# Altium PCB main.PcbDoc
Units mm, origin at the board's own origin, x right, y up, seen from the top; angles counter-clockwise.
Board outline 210 x 160 mm, 2 copper layers (Top Layer, Bottom Layer); 19 components, 0 nets, 784 pads, 0 vias.
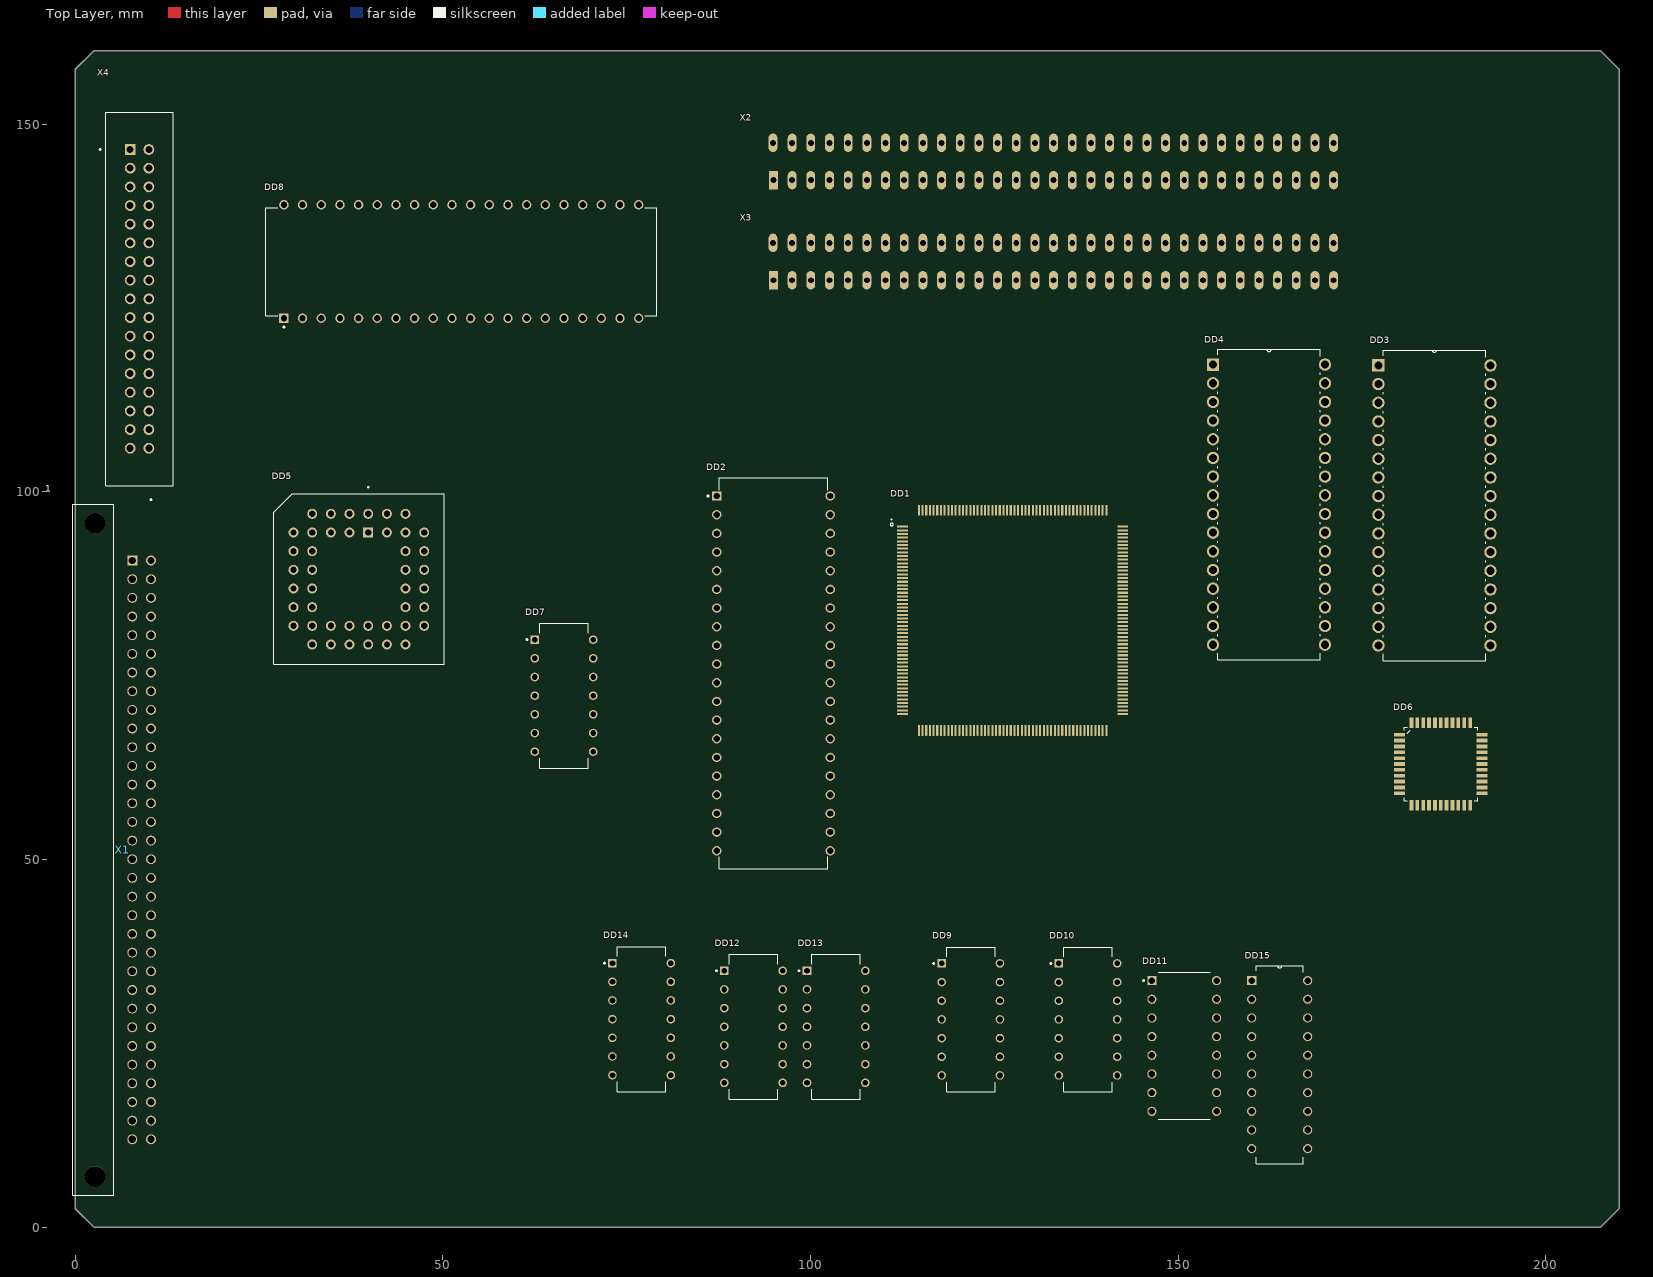
[diagram p0: Top Layer view]
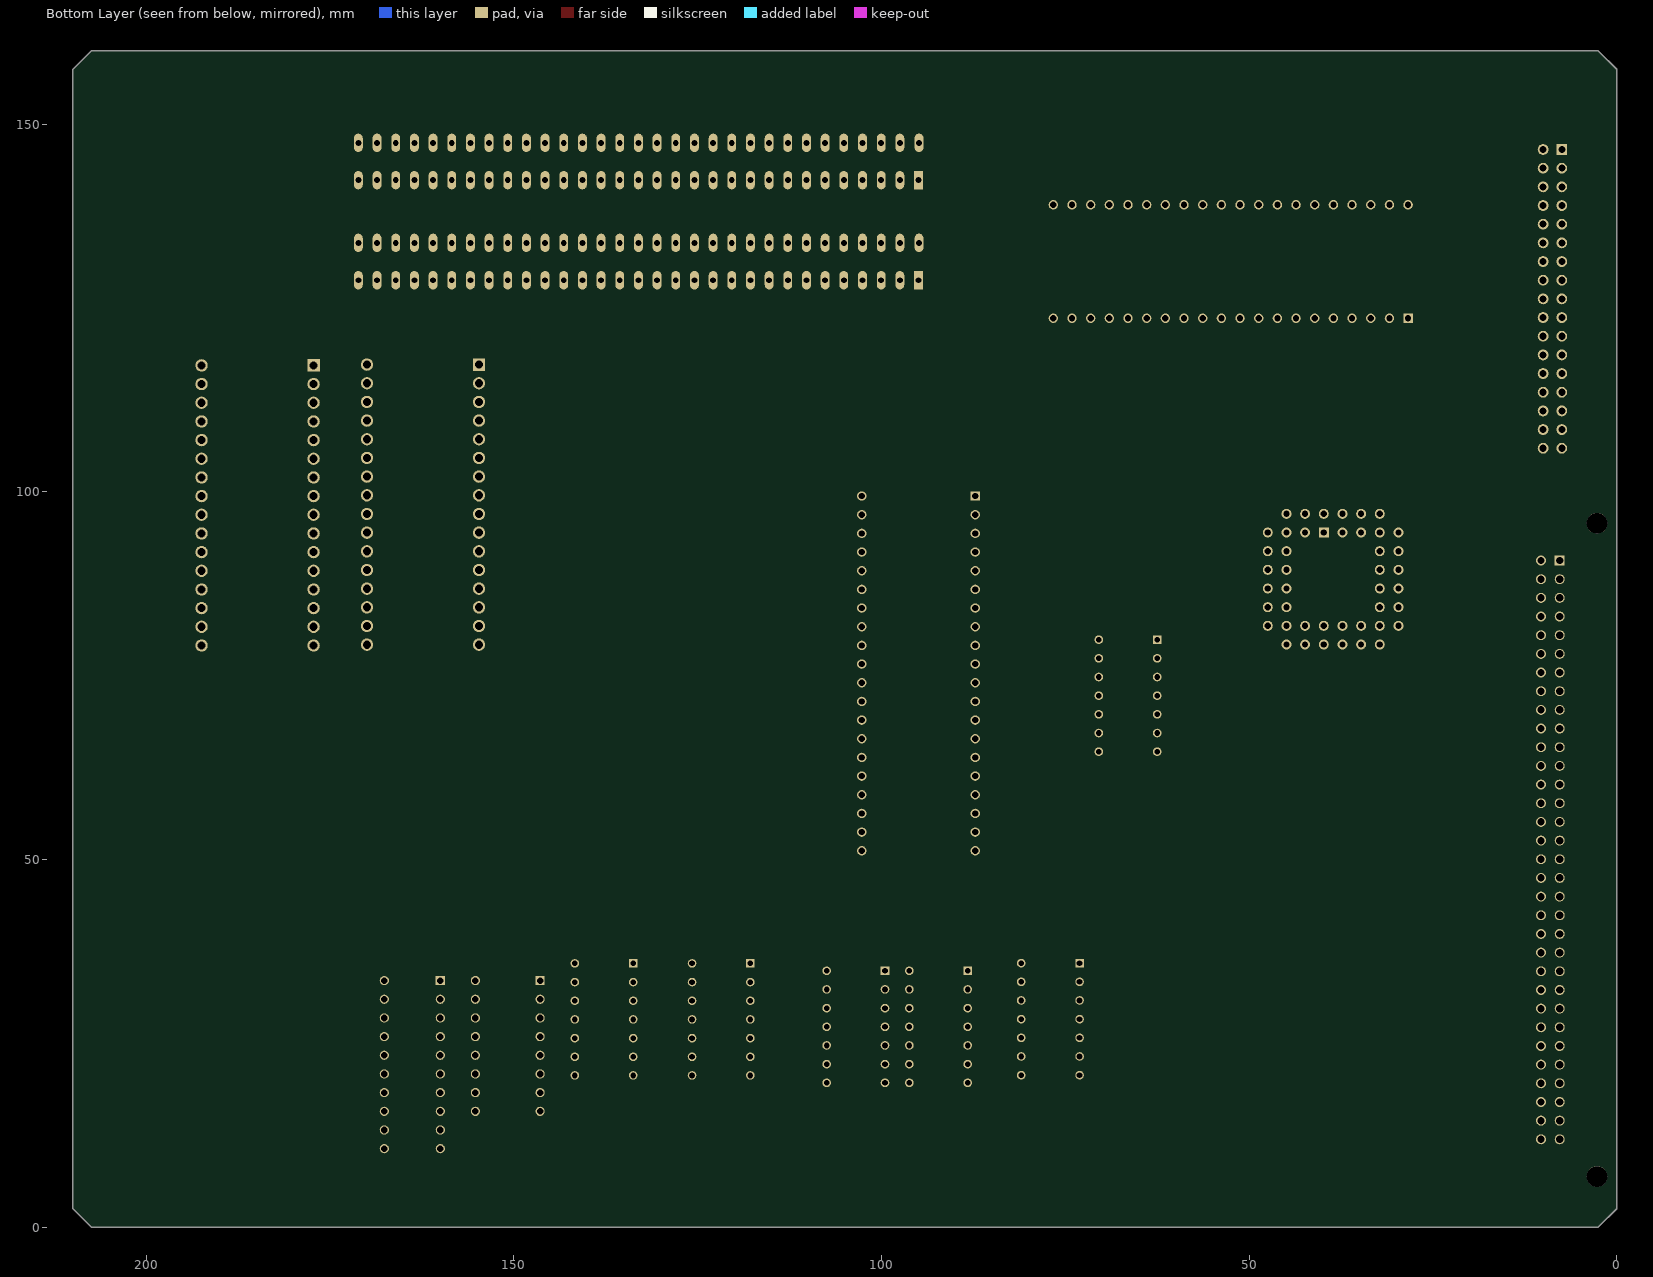
[diagram p1: Bottom Layer view, seen from below]

## Layer stack, top to bottom
Top Solder: solder mask 0.0102, Solder Resist, Dk 3.5
Top Layer: signal copper 0.0356
Dielectric 1: dielectric 0.32, FR-4, Dk 4.8
Bottom Layer: signal copper 0.0356
Bottom Solder: solder mask 0.0102, Solder Resist, Dk 3.5

## Board outline
2.5,0 0,2.5 0,157.5 2.5,160 207.5,160 210,157.5 210,2.5 207.5,0

## Design rules (kind name [scope] priority, off if disabled: settings)
Clearance [All] p1: gap=0.254 ignorepadtopadclearanceinfootprint=FALSE except(0: Arc-Hole Track-Hole SMDPad-Hole THPad-Hole Via-Hole Fill-Hole Poly-Hole Region-Hole Text-Hole)
PolygonConnect [All] p1: connectstyle=Relief reliefconductorwidth=0.254 reliefentries=4 polygonreliefangle="90 Angle" airgapwidth=0.254
RoomDefinition main [InComponentClass('main')] p1: confinementstyle=ConfineIn formatcopy=TRUE lockcomponents=FALSE outline 0,0 210,0 210,160 0,160
RoutingVias [All] p1: holewidth=0.711 width=1.27 viastyle="Through Hole" minholewidth=0.711 minwidth=1.27 maxholewidth=0.711 maxwidth=1.27
SolderMaskExpansion [All] p1: expansion=0.102
Width [All] p1: maxlimit=0.254 minlimit=0.254 preferedwidth=0.254
30 further rules are at their usual default settings.

## Components (designator, comment, footprint, x,y, rotation, side; value= is the part's Value field where it differs from the comment)
DD1 "epm3512aqc208-10" QFP50P3060X3060X409-208N 127.5,82.54 r0 top
DD2 "Z80" DIP1540W47P254L5320H635Q40B 94.97,75.32 r0 top
DD3 "HM628512ALP-7" DIP254P1524X482-32 192.5,79.12 r0 top
DD4 "AM29F040B" DIP254P1524X482-32 170,79.23 r0 top
DD5 "EPM3032ALC44" PLCC-44-R 38.57,88.14 r0 top
DD6 "EPM3032ATC44" QFP80P1200X1200X120-44N 185.75,63 r0 top
DD7 "КР1533ЛН1" DIP14 66.47,72.29 r0 top
DD8 "КР1818ВГ93" KR1818VG93 52.5,131.35 r90 top
DD9 "КР1533ТМ2" DIP14 121.81,28.25 r0 top
DD10 "КР1533ИЕ5" DIP14 137.75,28.25 r0 top
DD11 "КР1533ИЕ7" DIP16 150.85,24.64 r0 top
DD12 "КР1533ЛИ3" DIP14 92.25,27.25 r0 top
DD13 "КР1533ЛП5" DIP14 103.5,27.25 r0 top
DD14 "КР1533ЛA3" DIP14 77.03,28.29 r0 top
DD15 "КР1533ИР23" DIP20 167.64,10.67 r0 top
X1 "System" TE_6-1393644-3 10.29,90.68 r270 top
X2 "Bus" SL62 94.97,142.42 r90 top
X3 "Bus" SL62 94.97,128.81 r90 top
X4 "FDD" TE_103309-7 8.73,126.27 r90 top

## Footprints (in the part's own frame and the unit in brackets; to place one, negate y for a bottom-side part, rotate by r counter-clockwise, add the part's x,y. Pads: shape width x height; smd on the part's side, far side on the other; paste and mask are expansions set on the pad)
DIP14 [mm]
  rect 1.17x1.17 hole 0.77: 1(-3.97,7.62)
  round 1.17 hole 0.77: 2(-3.97,5.08) 3(-3.97,2.54) 4(-3.97,0) 5(-3.97,-2.54) 6(-3.97,-5.08) 7(-3.97,-7.62) 8(3.97,-7.62) 9(3.97,-5.08) 10(3.97,-2.54) 11(3.97,0) 12(3.97,2.54) 13(3.97,5.08) 14(3.97,7.62)
  silkscreen extent -5.15,-9.84 3.3,9.84, body extent -3.96,-9.65 3.96,9.65, height 5.59
DIP16 [mm]
  rect 1.25x1.25 / inner round 1.25 / far side rect 1.25x1.25 hole 0.9: 1(-4.4,8.89)
  round 1.25 hole 0.9: 2(-4.4,6.35) 3(-4.4,3.81) 4(-4.4,1.27) 5(-4.4,-1.27) 6(-4.4,-3.81) 7(-4.4,-6.35) 8(-4.4,-8.89) 9(4.4,-8.89) 10(4.4,-6.35) 11(4.4,-3.81) 12(4.4,-1.27) 13(4.4,1.27) 14(4.4,3.81) 15(4.4,6.35) 16(4.4,8.89)
  silkscreen extent -5.62,-10 3.55,10, body extent -4.62,-10 4.62,10, height 5.1
DIP20 [mm]
  rect 1.25x1.25 / inner round 1.25 / far side rect 1.25x1.25 hole 0.9: 1(-7.62,22.86)
  round 1.25 hole 0.9: 2(-7.62,20.32) 3(-7.62,17.78) 4(-7.62,15.24) 5(-7.62,12.7) 6(-7.62,10.16) 7(-7.62,7.62) 8(-7.62,5.08) 9(-7.62,2.54) 10(-7.62,0) 11(0,0) 12(0,2.54) 13(0,5.08) 14(0,7.62) 15(0,10.16) 16(0,12.7) 17(0,15.24) 18(0,17.78) 19(0,20.32) 20(0,22.86)
  silkscreen extent -7.01,-2.03 -0.61,24.89, body extent -7.75,-1.27 0.13,24.13, height 5.08
DIP254P1524X482-32 [mil]
  rect 66x66 hole 44: 1(-600,1500)
  round 66 hole 44: 2(-600,1400) 3(-600,1300) 4(-600,1200) 5(-600,1100) 6(-600,1000) 7(-600,900) 8(-600,800) 9(-600,700) 10(-600,600) 11(-600,500) 12(-600,400) 13(-600,300) 14(-600,200) 15(-600,100) 16(-600,0) 17(0,0) 18(0,100) 19(0,200) 20(0,300) 21(0,400) 22(0,500) 23(0,600) 24(0,700) 25(0,800) 26(0,900) 27(0,1000) 28(0,1100) 29(0,1200) 30(0,1300) 31(0,1400) 32(0,1500)
  silkscreen extent -575,-82 -25,1582, body extent -646,-46 51,1554, height 337
DIP1540W47P254L5320H635Q40B [mm]
  rect 1.28x1.28 hole 0.85: 1(-7.718,24.13)
  round 1.28 hole 0.85: 2(-7.718,21.59) 3(-7.718,19.05) 4(-7.718,16.51) 5(-7.718,13.97) 6(-7.718,11.43) 7(-7.718,8.89) 8(-7.718,6.35) 9(-7.718,3.81) 10(-7.718,1.27) 11(-7.718,-1.27) 12(-7.718,-3.81) 13(-7.718,-6.35) 14(-7.718,-8.89) 15(-7.718,-11.43) 16(-7.718,-13.97) 17(-7.718,-16.51) 18(-7.718,-19.05) 19(-7.718,-21.59) 20(-7.718,-24.13) 21(7.718,-24.13) 22(7.718,-21.59) 23(7.718,-19.05) 24(7.718,-16.51) 25(7.718,-13.97) 26(7.718,-11.43) 27(7.718,-8.89) 28(7.718,-6.35) 29(7.718,-3.81) 30(7.718,-1.27) 31(7.718,1.27) 32(7.718,3.81) 33(7.718,6.35) 34(7.718,8.89) 35(7.718,11.43) 36(7.718,13.97) 37(7.718,16.51) 38(7.718,19.05) 39(7.718,21.59) 40(7.718,24.13)
  silkscreen extent -9.02,-26.6 7.35,26.6, body extent -8.85,-26.2 8.85,26.2, height 9.06
KR1818VG93 [mm]
  rect 1.28x1.28 hole 0.85: 1(-7.718,24.13)
  round 1.28 hole 0.85: 2(-7.718,21.59) 3(-7.718,19.05) 4(-7.718,16.51) 5(-7.718,13.97) 6(-7.718,11.43) 7(-7.718,8.89) 8(-7.718,6.35) 9(-7.718,3.81) 10(-7.718,1.27) 11(-7.718,-1.27) 12(-7.718,-3.81) 13(-7.718,-6.35) 14(-7.718,-8.89) 15(-7.718,-11.43) 16(-7.718,-13.97) 17(-7.718,-16.51) 18(-7.718,-19.05) 19(-7.718,-21.59) 20(-7.718,-24.13) 21(7.718,-24.13) 22(7.718,-21.59) 23(7.718,-19.05) 24(7.718,-16.51) 25(7.718,-13.97) 26(7.718,-11.43) 27(7.718,-8.89) 28(7.718,-6.35) 29(7.718,-3.81) 30(7.718,-1.27) 31(7.718,1.27) 32(7.718,3.81) 33(7.718,6.35) 34(7.718,8.89) 35(7.718,11.43) 36(7.718,13.97) 37(7.718,16.51) 38(7.718,19.05) 39(7.718,21.59) 40(7.718,24.13)
  silkscreen extent -9.02,-26.6 7.35,26.6, body extent -8.85,-25.4 8.85,25.4, height 8.2
PLCC-44-R [mm]
  rect 1.358x1.358 hole 0.85: 1(1.27,6.35)
  round 1.358 hole 0.85: 2(-1.27,8.89) 3(-1.27,6.35) 4(-3.81,8.89) 5(-3.81,6.35) 6(-6.35,8.89) 7(-8.89,6.35) 8(-6.35,6.35) 9(-8.89,3.81) 10(-6.35,3.81) 11(-8.89,1.27) 12(-6.35,1.27) 13(-8.89,-1.27) 14(-6.35,-1.27) 15(-8.89,-3.81) 16(-6.35,-3.81) 17(-8.89,-6.35) 18(-6.35,-8.89) 19(-6.35,-6.35) 20(-3.81,-8.89) 21(-3.81,-6.35) 22(-1.27,-8.89) 23(-1.27,-6.35) 24(1.27,-8.89) 25(1.27,-6.35) 26(3.81,-8.89) 27(3.81,-6.35) 28(6.35,-8.89) 29(8.89,-6.35) 30(6.35,-6.35) 31(8.89,-3.81) 32(6.35,-3.81) 33(8.89,-1.27) 34(6.35,-1.27) 35(8.89,1.27) 36(6.35,1.27) 37(8.89,3.81) 38(6.35,3.81) 39(8.89,6.35) 40(6.35,8.89) 41(6.35,6.35) 42(3.81,8.89) 43(3.81,6.35) 44(1.27,8.89)
  silkscreen extent -11.59,-11.59 11.59,12.6, body extent -11.74,-11.74 11.74,11.74, height 8.31
QFP50P3060X3060X409-208N [mm]
  rrect25% 1.47x0.28 smd: 1(-14.97,12.75) 2(-14.97,12.25) 3(-14.97,11.75) 4(-14.97,11.25) 5(-14.97,10.75) 6(-14.97,10.25) 7(-14.97,9.75) 8(-14.97,9.25) 9(-14.97,8.75) 10(-14.97,8.25) 11(-14.97,7.75) 12(-14.97,7.25) 13(-14.97,6.75) 14(-14.97,6.25) 15(-14.97,5.75) 16(-14.97,5.25) 17(-14.97,4.75) 18(-14.97,4.25) 19(-14.97,3.75) 20(-14.97,3.25) 21(-14.97,2.75) 22(-14.97,2.25) 23(-14.97,1.75) 24(-14.97,1.25) 25(-14.97,0.75) 26(-14.97,0.25) 27(-14.97,-0.25) 28(-14.97,-0.75) 29(-14.97,-1.25) 30(-14.97,-1.75) 31(-14.97,-2.25) 32(-14.97,-2.75) 33(-14.97,-3.25) 34(-14.97,-3.75) 35(-14.97,-4.25) 36(-14.97,-4.75) 37(-14.97,-5.25) 38(-14.97,-5.75) 39(-14.97,-6.25) 40(-14.97,-6.75) 41(-14.97,-7.25) 42(-14.97,-7.75) 43(-14.97,-8.25) 44(-14.97,-8.75) 45(-14.97,-9.25) 46(-14.97,-9.75) 47(-14.97,-10.25) 48(-14.97,-10.75) 49(-14.97,-11.25) 50(-14.97,-11.75) 51(-14.97,-12.25) 52(-14.97,-12.75) 105(14.97,-12.75) 106(14.97,-12.25) 107(14.97,-11.75) 108(14.97,-11.25) 109(14.97,-10.75) 110(14.97,-10.25) 111(14.97,-9.75) 112(14.97,-9.25) 113(14.97,-8.75) 114(14.97,-8.25) 115(14.97,-7.75) 116(14.97,-7.25) 117(14.97,-6.75) 118(14.97,-6.25) 119(14.97,-5.75) 120(14.97,-5.25) 121(14.97,-4.75) 122(14.97,-4.25) 123(14.97,-3.75) 124(14.97,-3.25) 125(14.97,-2.75) 126(14.97,-2.25) 127(14.97,-1.75) 128(14.97,-1.25) 129(14.97,-0.75) 130(14.97,-0.25) 131(14.97,0.25) 132(14.97,0.75) 133(14.97,1.25) 134(14.97,1.75) 135(14.97,2.25) 136(14.97,2.75) 137(14.97,3.25) 138(14.97,3.75) 139(14.97,4.25) 140(14.97,4.75) 141(14.97,5.25) 142(14.97,5.75) 143(14.97,6.25) 144(14.97,6.75) 145(14.97,7.25) 146(14.97,7.75) 147(14.97,8.25) 148(14.97,8.75) 149(14.97,9.25) 150(14.97,9.75) 151(14.97,10.25) 152(14.97,10.75) 153(14.97,11.25) 154(14.97,11.75) 155(14.97,12.25) 156(14.97,12.75)
  rrect25% 0.28x1.47 smd: 53(-12.75,-14.97) 54(-12.25,-14.97) 55(-11.75,-14.97) 56(-11.25,-14.97) 57(-10.75,-14.97) 58(-10.25,-14.97) 59(-9.75,-14.97) 60(-9.25,-14.97) 61(-8.75,-14.97) 62(-8.25,-14.97) 63(-7.75,-14.97) 64(-7.25,-14.97) 65(-6.75,-14.97) 66(-6.25,-14.97) 67(-5.75,-14.97) 68(-5.25,-14.97) 69(-4.75,-14.97) 70(-4.25,-14.97) 71(-3.75,-14.97) 72(-3.25,-14.97) 73(-2.75,-14.97) 74(-2.25,-14.97) 75(-1.75,-14.97) 76(-1.25,-14.97) 77(-0.75,-14.97) 78(-0.25,-14.97) 79(0.25,-14.97) 80(0.75,-14.97) 81(1.25,-14.97) 82(1.75,-14.97) 83(2.25,-14.97) 84(2.75,-14.97) 85(3.25,-14.97) 86(3.75,-14.97) 87(4.25,-14.97) 88(4.75,-14.97) 89(5.25,-14.97) 90(5.75,-14.97) 91(6.25,-14.97) 92(6.75,-14.97) 93(7.25,-14.97) 94(7.75,-14.97) 95(8.25,-14.97) 96(8.75,-14.97) 97(9.25,-14.97) 98(9.75,-14.97) 99(10.25,-14.97) 100(10.75,-14.97) 101(11.25,-14.97) 102(11.75,-14.97) 103(12.25,-14.97) 104(12.75,-14.97) 157(12.75,14.97) 158(12.25,14.97) 159(11.75,14.97) 160(11.25,14.97) 161(10.75,14.97) 162(10.25,14.97) 163(9.75,14.97) 164(9.25,14.97) 165(8.75,14.97) 166(8.25,14.97) 167(7.75,14.97) 168(7.25,14.97) 169(6.75,14.97) 170(6.25,14.97) 171(5.75,14.97) 172(5.25,14.97) 173(4.75,14.97) 174(4.25,14.97) 175(3.75,14.97) 176(3.25,14.97) 177(2.75,14.97) 178(2.25,14.97) 179(1.75,14.97) 180(1.25,14.97) 181(0.75,14.97) 182(0.25,14.97) 183(-0.25,14.97) 184(-0.75,14.97) 185(-1.25,14.97) 186(-1.75,14.97) 187(-2.25,14.97) 188(-2.75,14.97) 189(-3.25,14.97) 190(-3.75,14.97) 191(-4.25,14.97) 192(-4.75,14.97) 193(-5.25,14.97) 194(-5.75,14.97) 195(-6.25,14.97) 196(-6.75,14.97) 197(-7.25,14.97) 198(-7.75,14.97) 199(-8.25,14.97) 200(-8.75,14.97) 201(-9.25,14.97) 202(-9.75,14.97) 203(-10.25,14.97) 204(-10.75,14.97) 205(-11.25,14.97) 206(-11.75,14.97) 207(-12.25,14.97) 208(-12.75,14.97)
  silkscreen extent -16.64,12.83 -16.24,13.72, body extent -15.29,-15.31 15.31,15.29, height 4.15
QFP80P1200X1200X120-44N [mil]
  rect 58x20 smd: 1(-221,157) 2(-221,126) 3(-221,94) 4(-221,63) 5(-221,31) 6(-221,0) 7(-221,-31) 8(-221,-63) 9(-221,-94) 10(-221,-126) 11(-221,-157) 23(221,-157) 24(221,-126) 25(221,-94) 26(221,-63) 27(221,-31) 28(221,0) 29(221,31) 30(221,63) 31(221,94) 32(221,126) 33(221,157)
  rect 20x58 smd: 12(-157,-221) 13(-126,-221) 14(-94,-221) 15(-63,-221) 16(-31,-221) 17(0,-221) 18(31,-221) 19(63,-221) 20(94,-221) 21(126,-221) 22(157,-221) 34(157,221) 35(126,221) 36(94,221) 37(63,221) 38(31,221) 39(0,221) 40(-31,221) 41(-63,221) 42(-94,221) 43(-126,221) 44(-157,221)
  silkscreen extent -197,-197 197,197
SL62 [mm]
  rect 2.5x1.2 hole 0.8: 1(0,0)
  oval 2.5x1.2 hole 0.8: 2(0,-2.54) 3(0,-5.08) 4(0,-7.62) 5(0,-10.16) 6(0,-12.7) 7(0,-15.24) 8(0,-17.78) 9(0,-20.32) 10(0,-22.86) 11(0,-25.4) 12(0,-27.94) 13(0,-30.48) 14(0,-33.02) 15(0,-35.56) 16(0,-38.1) 17(0,-40.64) 18(0,-43.18) 19(0,-45.72) 20(0,-48.26) 21(0,-50.8) 22(0,-53.34) 23(0,-55.88) 24(0,-58.42) 25(0,-60.96) 26(0,-63.5) 27(0,-66.04) 28(0,-68.58) 29(0,-71.12) 30(0,-73.66) 31(0,-76.2) 32(5.08,0.07) 33(5.08,-2.54) 34(5.08,-5.08) 35(5.08,-7.62) 36(5.08,-10.16) 37(5.08,-12.7) 38(5.08,-15.24) 39(5.08,-17.78) 40(5.08,-20.32) 41(5.08,-22.86) 42(5.08,-25.4) 43(5.08,-27.94) 44(5.08,-30.48) 45(5.08,-33.02) 46(5.08,-35.56) 47(5.08,-38.1) 48(5.08,-40.64) 49(5.08,-43.18) 50(5.08,-45.72) 51(5.08,-48.26) 52(5.08,-50.8) 53(5.08,-53.34) 54(5.08,-55.88) 55(5.08,-58.42) 56(5.08,-60.96) 57(5.08,-63.5) 58(5.08,-66.04) 59(5.08,-68.58) 60(5.08,-71.12) 61(5.08,-73.66) 62(5.08,-76.2)
  body extent -2.26,-80.77 7.21,4.57, height 16.13
TE_6-1393644-3 [mm] "DIN41612R"
  rect 1.35x1.35 hole 1: 1(0,-2.54)
  round 1.35 hole 1: 2(2.54,-2.54) 3(5.08,-2.54) 4(7.62,-2.54) 5(10.16,-2.54) 6(12.7,-2.54) 7(15.24,-2.54) 8(17.78,-2.54) 9(20.32,-2.54) 10(22.86,-2.54) 11(25.4,-2.54) 12(27.94,-2.54) 13(30.48,-2.54) 14(33.02,-2.54) 15(35.56,-2.54) 16(38.1,-2.54) 17(40.64,-2.54) 18(43.18,-2.54) 19(45.72,-2.54) 20(48.26,-2.54) 21(50.8,-2.54) 22(53.34,-2.54) 23(55.88,-2.54) 24(58.42,-2.54) 25(60.96,-2.54) 26(63.5,-2.54) 27(66.04,-2.54) 28(68.58,-2.54) 29(71.12,-2.54) 30(73.66,-2.54) 31(76.2,-2.54) 32(78.74,-2.54) 33(0,0) 34(2.54,0) 35(5.08,0) 36(7.62,0) 37(10.16,0) 38(12.7,0) 39(15.24,0) 40(17.78,0) 41(20.32,0) 42(22.86,0) 43(25.4,0) 44(27.94,0) 45(30.48,0) 46(33.02,0) 47(35.56,0) 48(38.1,0) 49(40.64,0) 50(43.18,0) 51(45.72,0) 52(48.26,0) 53(50.8,0) 54(53.34,0) 55(55.88,0) 56(58.42,0) 57(60.96,0) 58(63.5,0) 59(66.04,0) 60(68.58,0) 61(71.12,0) 62(73.66,0) 63(76.2,0) 64(78.74,0)
  round 2.8 hole 2.8 unplated: ""(-5.08,-7.62) ""(83.82,-7.62)
  silkscreen extent -8.38,-10.62 86.37,0.1, body extent -7.63,-15.29 86.37,0.25, height 8.92
TE_103309-7 [mil]
  rect 58x58 hole 38: 1(800,50)
  round 58 hole 38: 2(800,-50) 3(700,50) 4(700,-50) 5(600,50) 6(600,-50) 7(500,50) 8(500,-50) 9(400,50) 10(400,-50) 11(300,50) 12(300,-50) 13(200,50) 14(200,-50) 15(100,50) 16(100,-50) 17(0,50) 18(0,-50) 19(-100,50) 20(-100,-50) 21(-200,50) 22(-200,-50) 23(-300,50) 24(-300,-50) 25(-400,50) 26(-400,-50) 27(-500,50) 28(-500,-50) 29(-600,50) 30(-600,-50) 31(-700,50) 32(-700,-50) 33(-800,50) 34(-800,-50)
  silkscreen extent -1000,-180 1000,215, body extent -1004,-173 1004,177, height 366

## Part data
DD1: library part EPM3512AQC208-10
DD3: "512Kx8 Static RAM"
DD5: "44-Pin PLCC44"
DD6: "44-Pin TQFP"

## Nets (pads, with @x,y where several pads share a name; then routed paths per layer and width w, separated by ;. In a path a pad name is that pad's centre, name@x,y a point inside that pad or via, vN(x,y) a via of type N, cw(c..) or ccw(c..) an arc to the next point about the centre after c; other vN are vias at no path point)
pads on no net: DD1.1 DD1.2 DD1.3 DD1.4 DD1.5 DD1.6 DD1.7 DD1.8 DD1.9 DD1.10 DD1.11 DD1.12 DD1.13 DD1.14 DD1.15 DD1.16 DD1.17 DD1.18 DD1.19 DD1.20 DD1.21 DD1.22 DD1.23 DD1.24 DD1.25 DD1.26 DD1.27 DD1.28 DD1.29 DD1.30 DD1.31 DD1.32 DD1.33 DD1.34 DD1.35 DD1.36 DD1.37 DD1.38 DD1.39 DD1.40 DD1.41 DD1.42 DD1.43 DD1.44 DD1.45 DD1.46 DD1.47 DD1.48 DD1.49 DD1.50 DD1.51 DD1.52 DD1.53 DD1.54 DD1.55 DD1.56 DD1.57 DD1.58 DD1.59 DD1.60 DD1.61 DD1.62 DD1.63 DD1.64 DD1.65 DD1.66 DD1.67 DD1.68 DD1.69 DD1.70 DD1.71 DD1.72 DD1.73 DD1.74 DD1.75 DD1.76 DD1.77 DD1.78 DD1.79 DD1.80 DD1.81 DD1.82 DD1.83 DD1.84 DD1.85 DD1.86 DD1.87 DD1.88 DD1.89 DD1.90 DD1.91 DD1.92 DD1.93 DD1.94 DD1.95 DD1.96 DD1.97 DD1.98 DD1.99 DD1.100 DD1.101 DD1.102 DD1.103 DD1.104 DD1.105 DD1.106 DD1.107 DD1.108 DD1.109 DD1.110 DD1.111 DD1.112 DD1.113 DD1.114 DD1.115 DD1.116 DD1.117 DD1.118 DD1.119 DD1.120 DD1.121 DD1.122 DD1.123 DD1.124 DD1.125 DD1.126 DD1.127 DD1.128 DD1.129 DD1.130 DD1.131 DD1.132 DD1.133 DD1.134 DD1.135 DD1.136 DD1.137 DD1.138 DD1.139 DD1.140 DD1.141 DD1.142 DD1.143 DD1.144 DD1.145 DD1.146 DD1.147 DD1.148 DD1.149 DD1.150 DD1.151 DD1.152 DD1.153 DD1.154 DD1.155 DD1.156 DD1.157 DD1.158 DD1.159 DD1.160 DD1.161 DD1.162 DD1.163 DD1.164 DD1.165 DD1.166 DD1.167 DD1.168 DD1.169 DD1.170 DD1.171 DD1.172 DD1.173 DD1.174 DD1.175 DD1.176 DD1.177 DD1.178 DD1.179 DD1.180 DD1.181 DD1.182 DD1.183 DD1.184 DD1.185 DD1.186 DD1.187 DD1.188 DD1.189 DD1.190 DD1.191 DD1.192 DD1.193 DD1.194 DD1.195 DD1.196 DD1.197 DD1.198 DD1.199 DD1.200 DD1.201 DD1.202 DD1.203 DD1.204 DD1.205 DD1.206 DD1.207 DD1.208 DD2.1 DD2.2 DD2.3 DD2.4 DD2.5 DD2.6 DD2.7 DD2.8 DD2.9 DD2.10 DD2.11 DD2.12 DD2.13 DD2.14 DD2.15 DD2.16 DD2.17 DD2.18 DD2.19 DD2.20 DD2.21 DD2.22 DD2.23 DD2.24 DD2.25 DD2.26 DD2.27 DD2.28 DD2.29 DD2.30 DD2.31 DD2.32 DD2.33 DD2.34 DD2.35 DD2.36 DD2.37 DD2.38 DD2.39 DD2.40 DD3.1 DD3.2 DD3.3 DD3.4 DD3.5 DD3.6 DD3.7 DD3.8 DD3.9 DD3.10 DD3.11 DD3.12 DD3.13 DD3.14 DD3.15 DD3.16 DD3.17 DD3.18 DD3.19 DD3.20 DD3.21 DD3.22 DD3.23 DD3.24 DD3.25 DD3.26 DD3.27 DD3.28 DD3.29 DD3.30 DD3.31 DD3.32 DD4.1 DD4.2 DD4.3 DD4.4 DD4.5 DD4.6 DD4.7 DD4.8 DD4.9 DD4.10 DD4.11 DD4.12 DD4.13 DD4.14 DD4.15 DD4.16 DD4.17 DD4.18 DD4.19 DD4.20 DD4.21 DD4.22 DD4.23 DD4.24 DD4.25 DD4.26 DD4.27 DD4.28 DD4.29 DD4.30 DD4.31 DD4.32 DD5.1 DD5.2 DD5.3 DD5.4 DD5.5 DD5.6 DD5.7 DD5.8 DD5.9 DD5.10 DD5.11 DD5.12 DD5.13 DD5.14 DD5.15 DD5.16 DD5.17 DD5.18 DD5.19 DD5.20 DD5.21 DD5.22 DD5.23 DD5.24 DD5.25 DD5.26 DD5.27 DD5.28 DD5.29 DD5.30 DD5.31 DD5.32 DD5.33 DD5.34 DD5.35 DD5.36 DD5.37 DD5.38 DD5.39 DD5.40 DD5.41 DD5.42 DD5.43 DD5.44 DD6.1 DD6.2 DD6.3 DD6.4 DD6.5 DD6.6 DD6.7 DD6.8 DD6.9 DD6.10 DD6.11 DD6.12 DD6.13 DD6.14 DD6.15 DD6.16 DD6.17 DD6.18 DD6.19 DD6.20 DD6.21 DD6.22 DD6.23 DD6.24 DD6.25 DD6.26 DD6.27 DD6.28 DD6.29 DD6.30 DD6.31 DD6.32 DD6.33 DD6.34 DD6.35 DD6.36 DD6.37 DD6.38 DD6.39 DD6.40 DD6.41 DD6.42 DD6.43 DD6.44 DD7.1 DD7.2 DD7.3 DD7.4 DD7.5 DD7.6 DD7.7 DD7.8 DD7.9 DD7.10 DD7.11 DD7.12 DD7.13 DD7.14 DD8.1 DD8.2 DD8.3 DD8.4 DD8.5 DD8.6 DD8.7 DD8.8 DD8.9 DD8.10 DD8.11 DD8.12 DD8.13 DD8.14 DD8.15 DD8.16 DD8.17 DD8.18 DD8.19 DD8.20 DD8.21 DD8.22 DD8.23 DD8.24 DD8.25 DD8.26 DD8.27 DD8.28 DD8.29 DD8.30 DD8.31 DD8.32 DD8.33 DD8.34 DD8.35 DD8.36 DD8.37 DD8.38 DD8.39 DD8.40 DD9.1 DD9.2 DD9.3 DD9.4 DD9.5 DD9.6 DD9.7 DD9.8 DD9.9 DD9.10 DD9.11 DD9.12 DD9.13 DD9.14 DD10.1 DD10.2 DD10.3 DD10.4 DD10.5 DD10.6 DD10.7 DD10.8 DD10.9 DD10.10 DD10.11 DD10.12 DD10.13 DD10.14 DD11.1 DD11.2 DD11.3 DD11.4 DD11.5 DD11.6 DD11.7 DD11.8 DD11.9 DD11.10 DD11.11 DD11.12 DD11.13 DD11.14 DD11.15 DD11.16 DD12.1 DD12.2 DD12.3 DD12.4 DD12.5 DD12.6 DD12.7 DD12.8 DD12.9 DD12.10 DD12.11 DD12.12 DD12.13 DD12.14 DD13.1 DD13.2 DD13.3 DD13.4 DD13.5 DD13.6 DD13.7 DD13.8 DD13.9 DD13.10 DD13.11 DD13.12 DD13.13 DD13.14 DD14.1 DD14.2 DD14.3 DD14.4 DD14.5 DD14.6 DD14.7 DD14.8 DD14.9 DD14.10 DD14.11 DD14.12 DD14.13 DD14.14 DD15.1 DD15.2 DD15.3 DD15.4 DD15.5 DD15.6 DD15.7 DD15.8 DD15.9 DD15.10 DD15.11 DD15.12 DD15.13 DD15.14 DD15.15 DD15.16 DD15.17 DD15.18 DD15.19 DD15.20 X1. X1.1 X1.2 X1.3 X1.4 X1.5 X1.6 X1.7 X1.8 X1.9 X1.10 X1.11 X1.12 X1.13 X1.14 X1.15 X1.16 X1.17 X1.18 X1.19 X1.20 X1.21 X1.22 X1.23 X1.24 X1.25 X1.26 X1.27 X1.28 X1.29 X1.30 X1.31 X1.32 X1.33 X1.34 X1.35 X1.36 X1.37 X1.38 X1.39 X1.40 X1.41 X1.42 X1.43 X1.44 X1.45 X1.46 X1.47 X1.48 X1.49 X1.50 X1.51 X1.52 X1.53 X1.54 X1.55 X1.56 X1.57 X1.58 X1.59 X1.60 X1.61 X1.62 X1.63 X1.64 X2.1 X2.2 X2.3 X2.4 X2.5 X2.6 X2.7 X2.8 X2.9 X2.10 X2.11 X2.12 X2.13 X2.14 X2.15 X2.16 X2.17 X2.18 X2.19 X2.20 X2.21 X2.22 X2.23 X2.24 X2.25 X2.26 X2.27 X2.28 X2.29 X2.30 X2.31 X2.32 X2.33 X2.34 X2.35 X2.36 X2.37 X2.38 X2.39 X2.40 X2.41 X2.42 X2.43 X2.44 X2.45 X2.46 X2.47 X2.48 X2.49 X2.50 X2.51 X2.52 X2.53 X2.54 X2.55 X2.56 X2.57 X2.58 X2.59 X2.60 X2.61 X2.62 X3.1 X3.2 X3.3 X3.4 X3.5 X3.6 X3.7 X3.8 X3.9 X3.10 X3.11 X3.12 X3.13 X3.14 X3.15 X3.16 X3.17 X3.18 X3.19 X3.20 X3.21 X3.22 X3.23 X3.24 X3.25 X3.26 X3.27 X3.28 X3.29 X3.30 X3.31 X3.32 X3.33 X3.34 X3.35 X3.36 X3.37 X3.38 X3.39 X3.40 X3.41 X3.42 X3.43 X3.44 X3.45 X3.46 X3.47 X3.48 X3.49 X3.50 X3.51 X3.52 X3.53 X3.54 X3.55 X3.56 X3.57 X3.58 X3.59 X3.60 X3.61 X3.62 X4.1 X4.2 X4.3 X4.4 X4.5 X4.6 X4.7 X4.8 X4.9 X4.10 X4.11 X4.12 X4.13 X4.14 X4.15 X4.16 X4.17 X4.18 X4.19 X4.20 X4.21 X4.22 X4.23 X4.24 X4.25 X4.26 X4.27 X4.28 X4.29 X4.30 X4.31 X4.32 X4.33 X4.34